# EAGLE board elepot (EAGLE 7.2.0)
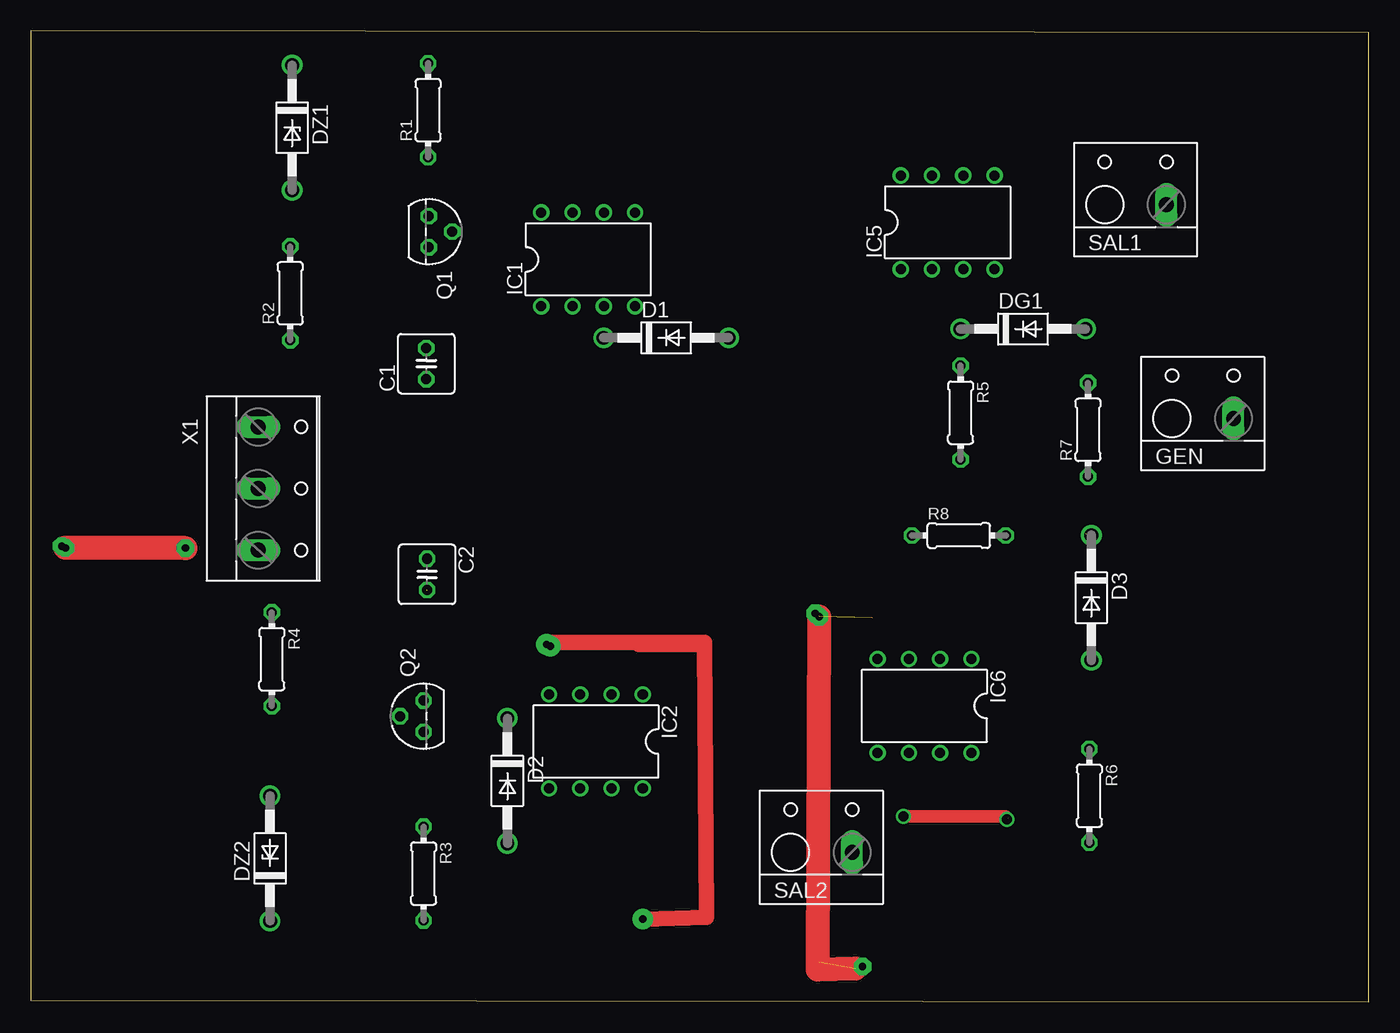
[diagram p0: board, top side]
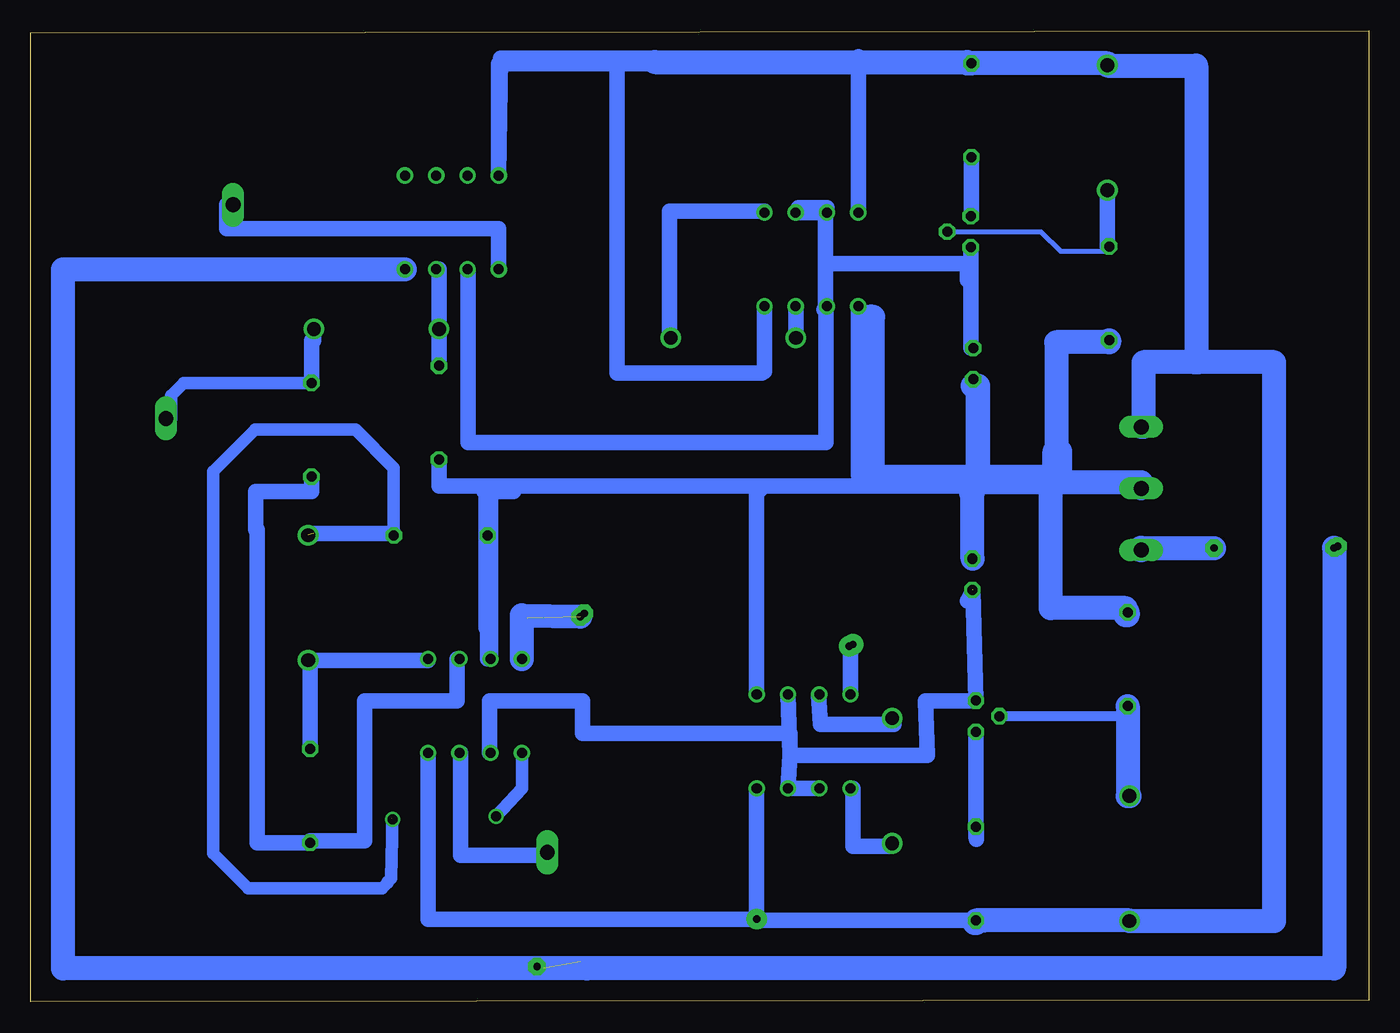
[diagram p1: board, bottom side, seen from below]

Size 108.67 x 78.88 mm. Coordinates in mm from the lower left corner, seen from the top.
Outline: 0,0.15 108.67,0 108.67,78.73 0,78.88 0,0.15
Copper layers (1*16): Top 0.035mm / dielectric 1.5mm / Bottom 0.035mm
Design rules "default": minimum track width 10mil, minimum drill 24mil, track to track 8mil, track to pad 8mil, pad to pad 8mil, via to via 8mil, smd to smd 8mil, copper to edge 40mil, drill to drill 8mil, minimum pad ring 10mil, minimum via ring 8mil, stop-mask expansion 4mil, vias tented up to drill 0mil, thermal gap 10mil

## Footprints (pad centres in the part's own frame; a part is rotated, then mirrored left to right if it is on the bottom)
C025-050X050 = drill 0.813 octagon: 1 -1.27,0; 2 1.27,0
DO41-10 = drill 1.118: A 5.08,0; C -5.08,0
DO41Z10 = drill 1.118: A 5.08,0; C -5.08,0
W237-112 = drill 1.194 long: 1 2.5,-1.27
DIL08 = drill 0.813 pad 1.27: 1 -3.81,-3.81; 2 -1.27,-3.81; 3 1.27,-3.81; 4 3.81,-3.81; 5 3.81,3.81; 6 1.27,3.81; 7 -1.27,3.81; 8 -3.81,3.81
TO92 = drill 0.813 octagon: 1 1.27,0; 2 0,1.905; 3 -1.27,0
0204/7 = drill 0.813 octagon: 1 -3.81,0; 2 3.81,0
W237-103 = drill 1.194 long: 1 -5,-1.29; 2 0,-1.29; 3 5,-1.29

## Placement (x,y rotation side)
C1  [C025-050X050]  32.12,51.84 90 top
C2  [C025-050X050]  32.18,34.73 270 top
D1  1N4004  [DO41-10]  51.61,53.95 0 top
D2  1N4004  [DO41-10]  38.71,17.96 270 top
D3  1N4004  [DO41-10]  86.14,32.83 270 top
DG1  1N4004  [DO41-10]  80.59,54.66 0 top
DZ1  1N4728  [DO41Z10]  21.23,71.01 270 top
DZ2  1N4728  [DO41Z10]  19.44,11.65 90 top
GEN  [W237-112]  95.19,48.66 0 top
IC1  LM555N  [DIL08]  45.27,60.31 0 top
IC2  LM555N  [DIL08]  45.9,21.16 180 top
IC5  LF353N  [DIL08]  74.47,63.31 0 top
IC6  LF353N  [DIL08]  72.59,24.04 180 top
Q1  2N3906  [TO92]  32.33,62.56 270 top
Q2  2N3906  [TO92]  31.9,23.2 90 top
R1  10k  [0204/7]  32.27,72.42 90 top
R2  2.2k  [0204/7]  21.08,57.55 90 top
R3  10k  [0204/7]  31.9,10.42 270 top
R4  2.2k  [0204/7]  19.58,27.84 270 top
R5  [0204/7]  75.52,47.86 270 top
R6  [0204/7]  85.97,16.74 270 top
R7  [0204/7]  85.86,46.46 90 top
R8  [0204/7]  75.37,37.88 0 top
SAL1  [W237-112]  89.73,66.02 0 top
SAL2  [W237-112]  64.21,13.41 0 top
X1  [W237-103]  19.77,41.7 270 top

## Library data of the parts
C1 C2 R1-R8 = rcl
D1-D3 DG1 DZ1 DZ2 = diode
GEN SAL1 SAL2 = con-wago-500; MPN: 237-112; OC_FARNELL: unknown; OC_NEWARK: 76R2974
IC1 IC2 IC5 IC6 = linear
Q1 Q2 = transistor-pnp
X1 = con-wago-500; MPN: 237-103; OC_FARNELL: unknown; OC_NEWARK: 18M7116

## Nets
GND: IC1.1 IC2.1 IC6.3 R5.2 R8.1 X1.2
N$1: DZ1.C IC1.4 IC1.8 R1.2 X1.1
N$2: Q1.3 R1.1
N$3: DZ2.C IC2.4 IC2.8 IC5.8 IC6.8 R3.2
N$4: C1.1 C2.1 R2.1 R4.1
N$5: DZ1.A Q1.2 R2.2
N$6: C1.2 IC1.2 IC1.6 IC1.7 Q1.1
N$7: D1.C IC1.3
N$8: D1.A IC1.5
N$9: Q2.3 R3.1
N$10: DZ2.A Q2.2 R4.2
N$11: C2.2 IC2.2 IC2.6 IC2.7 IC6.6 Q2.1
N$12: D2.C IC2.3
N$13: D2.A IC2.5
N$14: IC5.2
N$15: DG1.C IC5.3 R5.1
N$16: DG1.A GEN.1 R7.2
N$17: IC5.4 IC6.4 X1.3
N$18: IC6.2 R6.2 R7.1
N$19: D3.C IC6.5 R8.2
N$20: D3.A IC6.1 R6.1
N$21: IC6.7 SAL2.1
N$22: IC5.1 SAL1.1

## Tracks (layer width: path | path; a pad name or v marks a point on that pad's centre or on a via)
GND
  Bottom 0.406: 40.27,41.9 41.46,43.09
  Bottom 1.27: IC2.1 49.7,41.6 49.41,41.6 49.41,41.9 | 49.41,41.9 40.27,41.9 | R5.2 75.52,41.9 71.53,41.9 | 71.31,41.9 49.41,41.9 | IC1.1 41.46,43.09 41.46,42.78 31.71,42.78 | 71.31,41.9 IC6.3 71.56,27.85 R8.1 | 71.31,41.9 71.53,41.9 | 71.53,41.9 71.53,30.52 71.68,30.52 | 71.68,30.52 71.68,30.37 | 71.68,30.52 71.68,41.75 71.83,41.75 71.83,41.45 69.47,41.45
  Bottom 1.93: X1.2 18.48,42.2 31.71,42.2 31.71,42.78 31.71,50.03 32.16,50.03
N$1
  Bottom 1.27: IC1.4 49.08,51.21 49.27,51.21 49.27,51.06 61.07,51.06 61.06,76.5 57.98,76.34 | IC1.8 41.46,76.78 41.45,76.78 41.45,76.34
  Bottom 1.93: X1.1 18.3,46.7 18.3,51.95 13.87,51.95 13.87,52.1 14.01,52.1 14.01,76.05 21.23,76.05 DZ1.C 21.23,76.23 R1.2 32.6,76.23 32.6,76.34 41.45,76.34 57.98,76.34
N$2
  Bottom 1.27: R1.1 32.27,63.83 Q1.3
N$3  (via drill 0.6 pad 1.68)
  Top 1.27: v42.19,28.89 42.19,29.18 54.72,29.18 | 54.72,29.18 54.88,6.85 v49.7,6.71 | 54.72,29.18 54.72,29.04 49.41,29.04
  Bottom 1.27: IC2.8 v49.7,6.71 | v49.7,6.71 49.7,6.61 31.27,6.61 | IC2.4 42.09,28.89 v42.19,28.89 | 56.49,76.64 70.5,76.64 IC5.8 70.66,76.19 14.16,76.19 14.16,51.95 | IC6.8 76.39,6.71 v49.7,6.71
  Bottom 1.93: 14.16,51.95 7.67,51.95 7.67,6.56 DZ2.C 19.44,6.61 31.27,6.61 R3.2 31.9,6.42 32.01,6.42
N$4
  Bottom 0.406: 32.52,42.63 32.12,42.23 32.12,41.9 32.18,41.84 32.18,41.3
  Bottom 1.27: C1.1 32.12,41.9 41.3,41.9 41.3,56.09 41.45,56.09 41.45,56.38
  Bottom 1.93: R2.1 21.08,53.58 25.37,53.58 25.37,42.49 25.52,42.49 25.52,44.7 25.08,44.7 25.08,42.63 25.82,42.63 | 25.82,42.63 32.52,42.63 40.27,42.63 40.27,55.64 40.56,55.64 | R4.1 19.58,31.4 19.77,31.4 19.77,31.99 25.82,31.99 25.82,42.63 | C2.1 32.18,41.3 32.3,41.3
N$5
  Bottom 0.406: Q1.2 26.62,62.56 25.02,60.96 21.48,60.96 R2.2
  Bottom 1.27: DZ1.A 21.23,61.37 R2.2
N$6
  Bottom 0.406: IC1.2 44.11,56.5
  Bottom 1.27: 44.11,64.12 44.11,59.95 | 44.11,59.95 44.11,56.5 | 44.11,64.12 44.11,64.22 44,64.22 IC1.7 44,64.52 46.32,64.52 | 44.11,64.12 IC1.6 | C1.2 32.33,53.12 Q1.1 32.33,58.62 32.59,58.62 32.59,59.95 44.11,59.95
N$7
  Bottom 1.27: D1.C 46.52,56.5 IC1.3
N$8
  Bottom 1.27: IC1.5 49.08,64.22 56.8,64.22 56.8,53.95 D1.A
N$9
  Bottom 1.27: Q2.3 R3.1 | R3.1 31.9,13.37 31.86,13.37 | 31.86,13.37 31.86,13.22 | 31.86,13.37 31.86,14.23 R3.1
N$10
  Bottom 0.813: R4.2 19.58,23.2 Q2.2
  Bottom 1.93: R4.2 19.58,16.73 DZ2.A
N$11  (1 unrouted)
  Bottom 1.27: 32.6,32.59 32.16,33.44 Q2.1 31.9,24.45 35.99,24.45 35.84,20.02 47.02,20.02 | IC2.6 IC2.7 47.02,20.02 | 47.02,20.02 IC2.2 | 47.02,20.02 47.02,21.79 63.87,21.79 63.87,24.45 71.39,24.45 71.39,20.23 IC6.6
N$12
  Bottom 1.27: D2.C 38.56,22.54 44.55,22.54 44.69,24.96 IC2.3
N$13
  Bottom 1.27: D2.A 38.71,12.63 41.89,12.63 41.89,17.34 IC2.5
N$15
  Bottom 1.27: IC5.3 75.51,59.51 DG1.C R5.1
N$16
  Bottom 1.016: R7.2 96.25,50.27 97.28,49.25 97.28,47.34 97.83,46.79 97.83,47.25 GEN.1
  Bottom 1.27: R7.2 85.86,53.73 85.69,53.73 85.69,54.66 DG1.A
N$17  (via drill 0.6 pad 1.42)  (2 unrouted)
  Top 1.93: v12.57,36.87 v2.8,36.87 | v64.03,31.3 63.9,2.64 66.96,2.73
  Bottom 0.406: 68.78,31.4 68.58,31.4 68.36,31.18 | 63.63,31.18 63.89,31.09 64.02,31.31 | 64.02,3.25 63.5,2.73
  Bottom 1.93: X1.3 18.48,36.87 v12.57,36.87 | v2.8,36.87 2.8,2.73 63.5,2.73 106.05,2.73 106.05,59.51 IC5.4 | IC6.4 68.78,31.4 v64.03,31.3
N$18
  Bottom 1.27: R7.1 85.86,41.45 87.46,41.45 89.38,41.45 90.41,41.45 90.41,38.35 90.27,38.35 90.27,12.92 R6.2 85.97,13.07 81.56,13.07 81.56,24.45 74.04,24.45 74.04,27.85 IC6.2
N$19  (via drill 0.8)  (2 unrouted)
  Top 1.016: v70.88,15.08 79.17,15.08 79.36,14.89
  Bottom 1.016: IC6.5 68.78,17.34 v70.88,15.08 | R8.2 79.18,43.38 82.3,46.49 90.45,46.49 93.86,43.08 93.86,12.05 91.03,9.22 80.14,9.22 79.69,9.67 79.69,9.75 79.38,10.05 79.31,13.33 79.31,14.84 79.36,14.89
  Bottom 1.27: R8.2 79.18,38.05 85.69,38.05
N$20
  Bottom 1.27: IC6.1 76.39,27.75 D3.A 85.97,27.75 R6.1
N$21
  Bottom 1.27: SAL2.1 66.71,11.89 73.75,11.89 73.75,20.23 IC6.7
N$22
  Bottom 1.27: IC5.1 70.66,62.79 92.77,62.79 92.77,64.75 SAL1.1
N$23  (via drill 0.6 pad 1.68)
  other vias: 41.89,29.04
N$24  (via drill 0.8)
  other vias: 79.29,14.82
N$25  (via drill 0.6 pad 1.42)
  other vias: 2.51,37.02
N$26
  Bottom 1.27: 44.25,56.23 44.1,56.23 44.1,45.45 73.16,45.45 73.16,59.34
N$27  (via drill 0.6 pad 1.42)
  other vias: 67.55,2.87
N$28  (via drill 0.6 pad 1.42)
  other vias: 63.72,31.55